# EAGLE board hl_bme280_out_pcb (EAGLE 9.5.2)
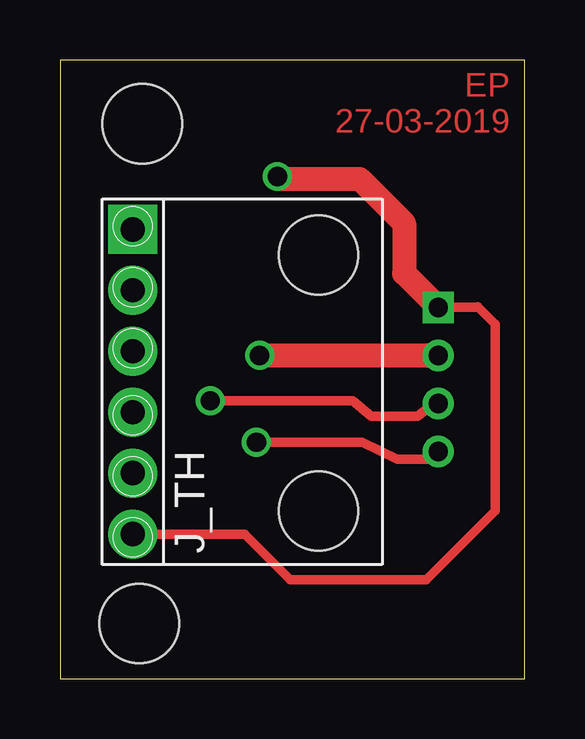
[diagram p0: board, top side]
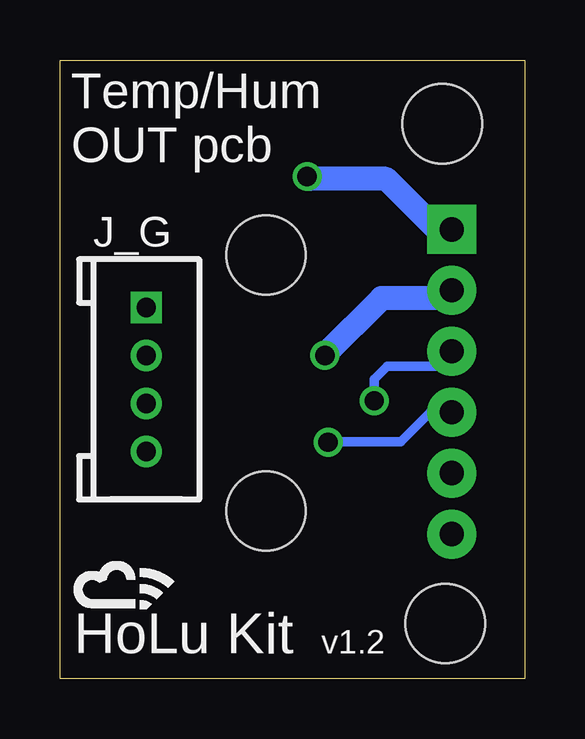
[diagram p1: board, bottom side, seen from below]

Size 19.36 x 25.77 mm. Coordinates in mm from the lower left corner, seen from the top.
Outline: 0,0 19.36,0 19.36,25.77 0,25.77 0,0
Copper layers (1*16): Top 0.035mm / dielectric 1.5mm / Bottom 0.035mm
Design rules "default *": minimum track width 6mil, minimum drill 0.35mm, track to track 0.4mm, track to pad 0.4mm, pad to pad 0.4mm, via to via 0.4mm, smd to smd 6mil, copper to edge 40mil, drill to drill 6mil, minimum pad ring 10mil, minimum via ring 8mil, stop-mask expansion 4mil, vias tented up to drill 0mil, thermal gap 10mil
Net classes: 0 default: width 0.4 mm, clearance 0.7 mm; 1 power_5V: width 1 mm, clearance 0.7 mm
Holes 3.3 mm at 3.43,23.11 10.78,17.65 3.3,2.29 10.78,6.99

## Footprints (pad centres in the part's own frame; a part is rotated, then mirrored left to right if it is on the bottom)
4P-2.0 = drill 0.8 pad 1.27 square: 1 -3,0 | drill 0.8 pad 1.27: 2 -1,0; 3 1,0; 4 3,0
6P-2.54-80/40MIL = drill 1.016 pad 2.032 square: 1 0,6.35 | drill 1.016 pad 2.032: 2 0,3.81; 3 0,1.27; 4 0,-1.27; 5 0,-3.81; 6 0,-6.35

## Placement (x,y rotation side)
J_G  [4P-2.0]  15.76,12.46 270 bottom
J_TH  [6P-2.54-80/40MIL]  3.03,12.37 0 top
U$1  [BME280_BO_NOPADS]  1.76,4.75 0 top

## Library data of the parts
J_G J_TH = Connector
U$1 = OTS

## Nets
+3V3: J_G.1 J_TH.1 J_TH.6
CSB: J_TH.5
GND [power_5V]: J_G.2 J_TH.2
SCL: J_G.3 J_TH.3
SDA: J_G.4 J_TH.4

## Tracks (layer width: path | path; a pad name or v marks a point on that pad's centre or on a via)
+3V3  (via drill 0.8)
  Top 0.4: J_TH.6 7.69,6.02 9.59,4.12 15.26,4.12 18.14,7 18.14,14.76 17.4,15.5 17.36,15.46 J_G.1
  Top 1: J_G.1 14.34,16.88 14.34,18.96 12.49,20.82 9.06,20.82 v9.06,20.92
  Bottom 1: J_TH.1 3.66,18.72 5.76,20.82 8.96,20.82 v9.06,20.92
GND  (via drill 0.8)
  Top 1: v8.31,13.46 J_G.2
  Bottom 1: J_TH.2 3.36,15.85 5.95,15.85 8.31,13.49 v8.31,13.46
SCL  (via drill 0.8)
  Top 0.4: v6.27,11.57 11.43,11.57 12.2,11.57 12.98,10.92 14.9,10.92 15.56,11.46 J_G.3
  Bottom 0.4: J_TH.3 3.66,13.01 5.73,13.01 6.27,12.47 v6.27,11.57
SDA  (via drill 0.8)
  Top 0.4: v8.19,9.85 12.59,9.85 14.04,9.14 15.49,9.14 J_G.4
  Bottom 0.4: v8.19,9.85 8.17,9.86 5.17,9.86 3.93,11.1 J_TH.4

## Text on the board
Top: EP / 27-03-2019
bPlace: Temp/Hum / OUT pcb | v1.2 | HoLu Kit
tDocu: Designed by Stichting Waag Society / / Released under the Creative Commons Attribution Share-Alike 4.0 Licence / https://creativecommons.org/licenses/by-sa/4.0/